# Altium PCB PCB_assembly_drawing_try2.PcbDoc (part 3 of 5)
Units mm, origin at the board's own origin, x right, y up, seen from the top; angles counter-clockwise.
Board outline 187.5 x 240 mm, 2 copper layers (Top Layer, Bottom Layer), stack 2.8 mm thick; 485 components, 419 nets, 1569 pads, 683 vias.
Unrouted connection lines stored in the file: 11.
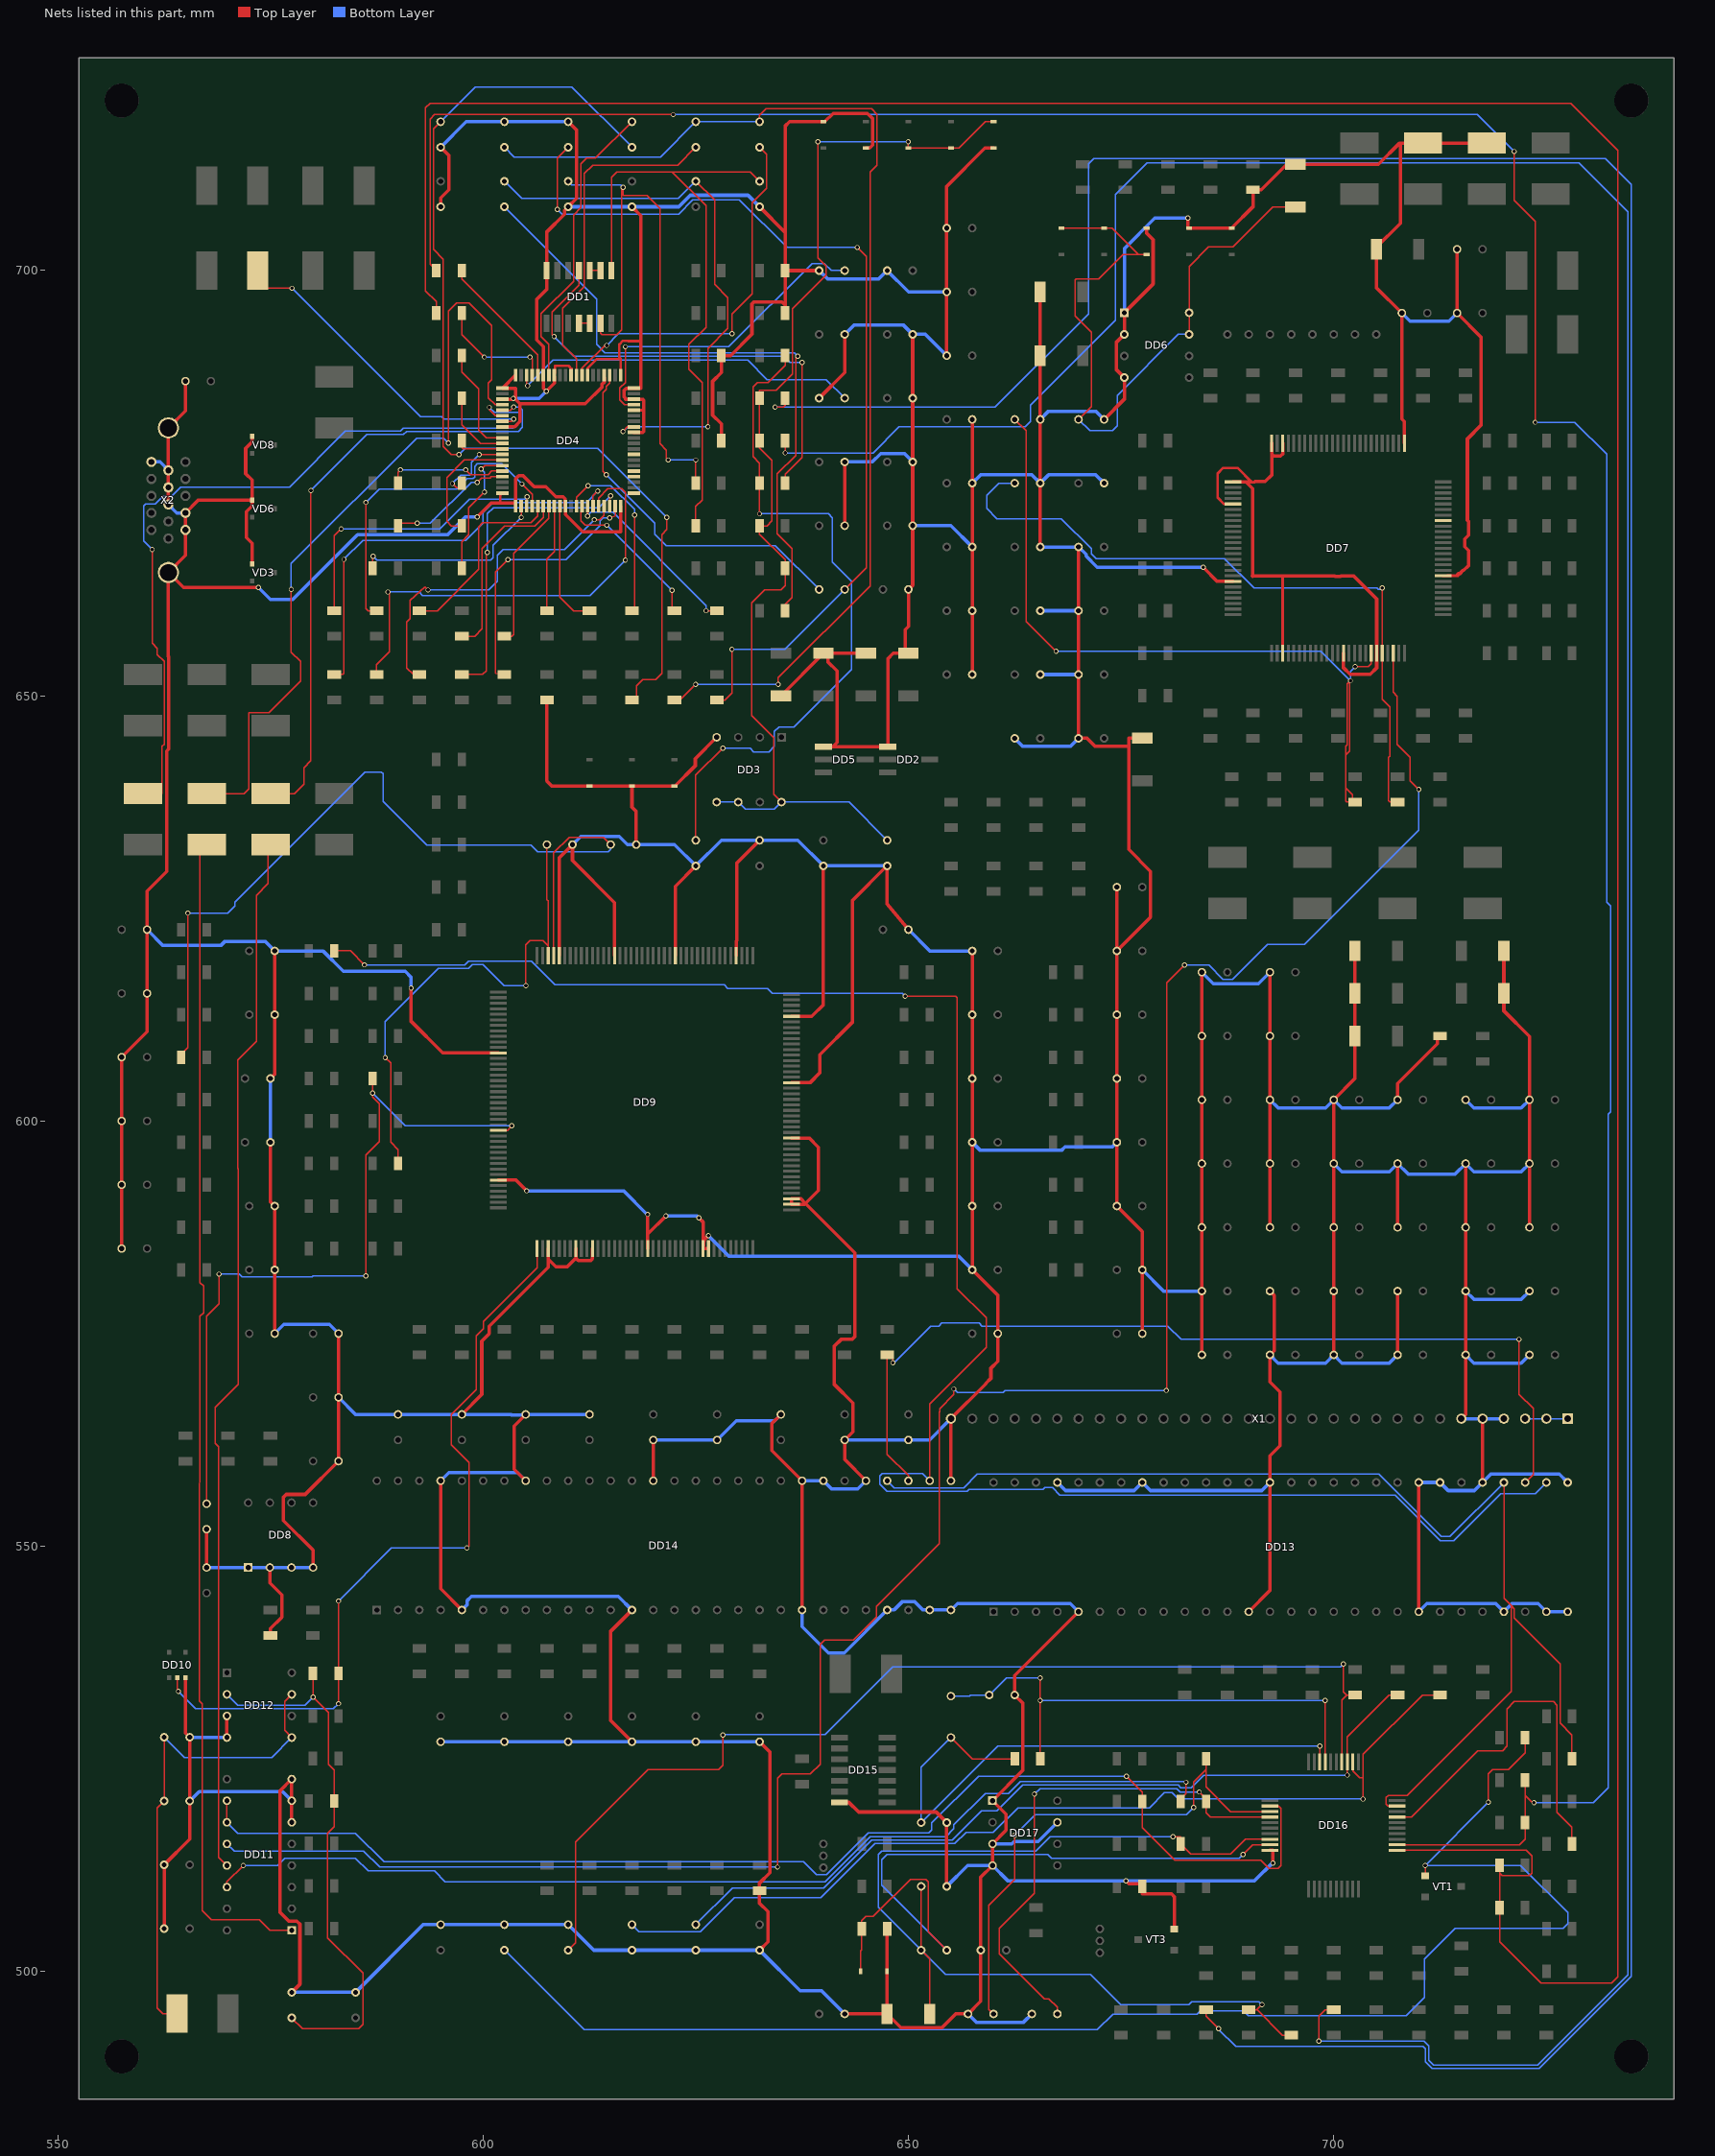
[diagram p3: the nets of this part, all layers, seen from the top]

## Via types
v1: diameter 0.6, hole 0.4, Top Layer to Bottom Layer, 677 vias
v2: diameter 0.5, hole 0.4, Top Layer to Bottom Layer, 3 vias
v3: diameter 0.4, hole 0.4, Top Layer to Bottom Layer, 2 vias
v4: diameter 0.6, hole 0.3, Top Layer to Bottom Layer, 1 vias

## Nets (pads, with @x,y where several pads share a name; then routed paths per layer and width w, separated by ;. In a path a pad name is that pad's centre, name@x,y a point inside that pad or via, vN(x,y) a via of type N, cw(c..) or ccw(c..) an arc to the next point about the centre after c; other vN are vias at no path point) (continued)
GND: C1.2 C2.2 C3.2 C4.2 C5.2 C6.2 C7.2 C8.2 C9.2 C10.2 C11.2 C12.2 C13.2 C14.2 C15.2 C17.2 C18.2 C19.2 C25.1 C26.2 C27.1 C28.2 C29.1 C30.2 C31.2 C32.2 C33.2 C34.2 C35.2 C36.2 C37.2 C38.2 C39.2 C40.2 C41.2 C42.2 C43.2 C44.1 C45.1 C46.1 C47.1 C48.1 C49.1 C50.1 C51.1 C52.2 C53.1 C54.1 C55.1 C56.1 C57.2 C58.1 C59.1 C60.1 C61.1 C62.1 C63.1 C64.2 C65.1 C66.1 C67.1 C68.1 C69.1 C70.1 C71.1 C72.1 C73.1 C74.1 C75.1 C76.1 C77.1 C78.1 C79.1 C80.1 C81.1 C82.1 C83.1 C84.1 C85.1 C86.1 C87.1 C88.1 C89.1 C90.1 C91.1 C92.1 C93.1 C94.1 C95.1 C96.1 C97.1 C98.1 C99.1 C100.1 C101.1 C102.1 C103.1 C104.1 C105.1 C106.1 C107.1 C108.1 C109.1 C110.1 C111.1 C112.1 C113.1 C114.1 C115.1 C116.1 C117.1 C118.1 C119.1 C120.1 C121.1 C122.1 C123.1 C124.1 C125.1 C126.1 C127.1 C128.2 C129.2 C130.1 C131.2 C132.2 C133.2 C134.2 C135.2 C136.2 C137.2 C138.1 C139.1 C140.1 C141.1 C142.1 C143.1 C144.1 C145.1 C146.1 C147.1 C148.1 C149.1 C150.1 C151.1 C152.1 C153.1 C154.1 C155.1 C156.1 C157.1 C158.2 C159.1 C160.2 C161.2 C162.1 C163.2 C164.2 C165.1 C166.2 C168.2 C169.2 C170.2 C171.2 C172.1 DD1.7 DD2.1 DD3.4 DD4.1 DD4.10 DD4.20 DD4.21 DD4.24 DD4.25 DD4.28 DD4.32 DD4.36 DD4.38 DD4.40 DD4.41 DD4.44 DD4.47 DD4.50 DD4.53 DD4.55 DD4.60 DD4.61 DD4.63 DD4.68 DD4.80 DD5.1 DD6.1 DD6.2 DD6.4 DD7.1 DD7.5 DD7.19 DD7.28 DD7.39 DD7.45 DD7.58 DD7.68 DD7.76 DD7.98 DD7.100 DD8.1 DD8.2 DD8.3 DD8.4 DD9.12 DD9.35 DD9.43 DD9.48 DD9.51 DD9.61 DD9.71 DD9.72 DD9.82 DD9.83 DD9.94 DD9.104 DD9.116 DD9.124 DD9.135 DD9.146 DD9.156 DD10.3 DD11.6 DD11.7 DD11.8 DD12.3 DD12.4 DD13.5 DD13.13 DD13.21 DD13.25 DD13.27 DD13.28 DD13.29 DD13.33 DD13.35 DD13.36 DD13.43 DD13.49 DD13.53 DD14.5 DD14.13 DD14.21 DD14.25 DD14.27 DD14.28 DD14.29 DD14.33 DD14.35 DD14.36 DD14.43 DD14.49 DD14.53 DD15.7 DD16.20 DD17.1 DD17.3 DD17.4 DD17.7 L16.1 L17.1 R3.1 R5.1 R15.1 R16.1 R17.1 R49.1 R178.1 R180.1 R204.1 R205.1 R218.1 VD1.1 VD2.1 VD3.1 VD4.1 VD5.1 VD6.1 VD7.1 VD8.1 VD11.1 VD12.1 VD13.1 VD14.1 VD17.1 VT3.2 X1.4 X1.5 X1.6 X1.30 X2.4 X2.5 X2.6 X2.7 X2.8 X2.11 X2.16 X2.17 | length 2764.2
  Top Layer w0.3: 602,672.6 602,672.674 602,673.547 DD4.80@602.278,673.825 ; DD4.53@608.375,687.722 608.375,687.926 608.459,688.01 608.459,688.803 610.035,688.803 610.4,688.438 DD4.50@610.4,687.7 ; DD4.47@612.275,687.722 612.275,688.513 613.362,689.6 616.175,689.6 ; DD4.41@616.175,687.722 616.175,689.6 ; DD4.36@617.722,683.575 618.775,683.575 618.8,683.6 ; 618.4,691.7 617.04,691.7 617.004,691.736 616.42,691.736 616.008,691.324 616.008,689.767 616.175,689.6 ; DD7.5@688.15,672.55 687.13,672.55 686.351,673.329 686.351,676.146 687.008,676.804 688.696,676.804 690.35,675.15 690.4,675.1 690.7,675.1 ; DD7.28@694,655 694,664.1 ; DD7.58@712.8,664.1 713.358,664.1 713.387,664.129 714.617,664.129 714.523,664.223
  Top Layer w0.4: C93.1@557.5,585 C97.1@557.5,592.5 C101.1@557.5,600 C104.1@557.5,607.5 560.5,610.5 C107.1@560.5,615 C110.1@560.5,622.5 560.5,627.048 562.797,629.345 562.797,643.515 563.054,643.772 563.054,654.554 563,654.608 X2.16@563,664.5 ; C130.1@562.5,505.04 C131.2@562.5,512.54 565.5,515.54 C132.2@565.5,520.04 C133.2@565.5,527.54 565,528.04 DD10.3@565,534.54 ; X2.8@563,672.5 X2.7@563,674.5 X2.6@563,676.5 X2.17@563,681.5 565,683.5 C172.1@565,687 ; C62.1@567.5,547.5 C90.1@567.5,552 ; DD12.4@569.88,527.5 DD12.3@569.88,530.04 ; VD3.1@572.85,665.5 572.85,667.94 572.186,668.604 572.186,671.648 572.85,672.313 VD6.1@572.85,673 ; VD8.1@572.85,680.5 572.85,679.86 572.084,679.094 572.084,676.126 572.85,675.361 VD6.1@572.85,673 ; v1(573.583,662.737) 564.763,662.737 X2.16@563,664.5 ; DD8.2@574.92,547.5 574.92,545.694 576.326,544.288 576.326,541.655 575,540.329 R178.1@575,539.5 ; C121.1@575,597.5 575,590.5 C119.1@575.5,590 C116.1@575.5,582.5 C113.1@575.5,575 ; C123.1@575,605 575.5,605.5 C125.1@575.5,612.5 C127.1@575.5,620 ; C129.2@577.5,497.54 578.46,498.5 578.46,505.562 578.104,505.917 577.164,505.917 576.142,506.939 576.142,521.262 DD11.8@577.475,522.595 ; DD11.6@577.5,517.54 577.475,517.565 577.475,520.055 DD11.7@577.5,520.08 577.475,520.105 DD11.8@577.475,522.595 ; DD11.8@577.5,522.62 DD11.8@577.475,522.595 ; DD8.4@580,547.5 580,549.538 576.504,553.034 576.504,555.759 576.834,556.089 579.089,556.089 C80.1@583,560 C84.1@583,567.5 C88.1@583,575 ; v1(591.541,615.645) 591.541,611.708 595.249,608 DD9.12@601.8,608 ; DD14.53@595,557.7 595,545 DD14.5@597.5,542.5 ; C10.2@595,707.5 595,708.538 595.96,709.498 595.96,713.54 C17.2@595,714.5 ; C106.1@597.5,565.5 599.842,567.842 599.842,574.131 600.705,574.995 600.705,575.858 607.65,582.803 607.65,583.762 ; v1(599.288,671.017) 600.939,672.668 602,672.674 ; DD9.35@601.8,593.05 603.849,593.05 v1(605.104,591.795) ; 602,672.674 DD4.1@603.809,672.684 ; DD4.68@602.278,681.629 603.727,681.629 604.342,682.244 604.342,684.327 ; DD4.63@602.278,684.875 v1@603.468,684.875 ; v1(603.555,684.962) v1@603.468,684.875 ; DD4.60@603.821,687.722 603.821,687.718 DD4.61@602.278,686.175 603.809,686.175 v1@603.809,684.875 ; DD4.1@603.825,672.278 603.825,672.668 DD4.1@603.809,672.684 ; DD14.49@605,557.7 603.642,559.058 603.642,564.142 C103.1@605,565.5 ; R17.1@607.5,649.5 607.492,649.5 607.492,639.984 608.076,639.4 VD2.1@612.5,639.4 VD1.1@617.5,639.4 ; DD9.43@607.65,585 607.65,583.762 ; 608.409,686.825 608.409,687.412 608.4,687.422 608.4,686.784 v1(607.416,685.8) 607.075,686.141 DD4.55@607.075,687.722 607.075,691.068 606.306,691.837 606.306,696.614 607.46,697.768 DD1.7@607.46,700 607.46,704.51 609.578,706.628 609.578,707.078 C7.2@610,707.5 610.972,708.472 610.972,716.528 C19.2@610,717.5 ; DD9.156@608.95,619.45 608.95,630.95 C63.1@610.5,632.5 610.5,630.622 615.45,625.672 DD9.146@615.45,619.45 ; DD9.48@610.9,585 610.9,583.874 ; DD9.51@612.85,585 612.85,583.792 612.648,583.59 611.184,583.59 610.9,583.874 ; DD4.44@614.229,687.4 614.229,686.863 613.948,686.582 613.948,686.264 612.011,684.327 604.342,684.327 ; DD4.20@616.175,672.278 616.175,669.301 616.172,669.298 611.699,669.298 609.675,671.322 DD4.10@609.675,672.278 609.64,672.313 609.64,673.175 609.406,673.409 608.544,673.409 607.355,674.599 605.993,674.599 604.698,675.894 604.19,675.894 603.809,675.513 DD4.1@603.809,672.684 ; C118.1@617.5,527 615.01,529.49 615.01,540.01 DD14.13@617.5,542.5 ; C13.2@617.5,707.5 618.541,706.459 618.541,686.175 DD4.40@617.722,686.175 616.838,686.175 616.873,686.14 616.825,686.14 616.591,685.906 616.591,685.144 616.806,684.928 616.754,684.875 DD4.38@617.722,684.875 618.744,684.875 618.871,684.748 618.871,681.102 618.744,680.975 DD4.32@617.722,680.975 ; C61.1@618,632.5 618,636.406 617.5,636.906 VD1.1@617.5,639.4 ; DD9.61@619.35,585 619.35,586.693 ; v1(619.35,589.026) 619.35,586.693 ; DD14.43@620,557.7 C96.1@620,562.5 ; v1(621.495,588.838) 619.35,586.693 ; DD9.135@622.6,619.45 622.6,627.6 C11.2@625,630 ; v1(625.365,588.61) 625.85,588.125 DD9.71@625.85,585 ; v1(626.47,586.532) 625.971,586.033 DD9.71@625.85,585 ; DD9.72@626.5,585 DD9.71@625.85,585 ; DD3.4@627.46,645.12 624.942,642.602 624.942,641.777 622.564,639.4 VD4.1@622.5,639.4 VD1.1@617.5,639.4 ; R5.1@628,680 628,681.965 626.974,682.991 626.974,686.968 628,687.995 R3.1@628,689.991 ; R3.1@628,690 R3.1@628,689.991 ; DD9.124@629.75,619.45 629.75,621.159 629.832,621.24 629.832,630.332 C37.2@632.5,633 ; C169.2@632.5,502.5 633.476,503.476 633.476,507.035 632.5,508.011 R204.1@632.5,509.5 632.5,510.402 633.705,511.607 633.705,525.795 C112.1@632.5,527 ; C8.2@632.5,707.5 635.5,704.5 ; C87.1@635,565.5 633.933,564.433 633.933,561.267 DD14.36@637.5,557.7 DD14.21@637.5,542.5 ; C40.2@635,650 C35.2@640,655 C35.2@640.563,655 ; R15.1@635.5,695 635.5,695.96 ; DD9.94@636.25,598 638.329,598 639.412,596.917 639.412,591.82 637.902,590.31 ; DD9.104@636.25,604.5 638.425,604.5 639.598,605.674 639.598,607.799 643.397,611.597 643.397,625.897 C15.2@647.5,630 647.5,625.526 C70.1@650,622.5 ; DD9.116@636.25,612.3 638.624,612.3 640,613.676 C39.2@640,630 ; C27.1@639.5,685 642.5,688 C28.2@642.5,692.5 ; C29.1@639.5,700 R16.1@635.5,700 ; DD5.1@640,644 641.096,644 ; DD15.7@641.9,519.88 643.001,519.88 644.137,518.744 653.256,518.744 C161.2@654.5,517.5 C165.1@654.5,510 ; C158.2@642.5,495 C163.2@647.5,495 ; C25.1@642.5,670 C26.2@642.5,677.5 ; DD14.33@645,557.7 642.5,560.2 C83.1@642.5,562.5 643.458,563.458 643.458,566.852 641.299,569.011 641.299,573.532 642.087,574.319 643.382,574.319 643.712,574.65 643.712,584.5 637.902,590.31 ; C14.2@645,655 C35.2@640.563,655 ; VD7.1@645,714.4 645.414,714.4 645.77,714.756 645.77,717.88 645.16,718.49 641.146,718.49 640.156,717.5 VD5.1@640,717.5 636.016,717.5 635.5,716.984 635.5,704.5 ; R205.1@647.5,505 VD17.1@647.5,500 C163.2@647.5,495 ; C6.2@650,655 C6.2@649.621,655 ; C30.2@650.5,692.5 C31.2@650.5,685 C32.2@650.5,677.5 C33.2@650.5,670 650.5,663 C34.2@650,662.5 650,658.169 649.621,657.79 C6.2@649.621,655 ; C9.2@654.5,690 C12.2@654.5,697.5 C36.2@654.5,705 654.5,709.905 658.995,714.4 VD11.1@660,714.4 ; DD14.29@655,557.7 655,561.34 X1.30@655,565 659.113,569.113 659.113,569.154 659.697,569.738 659.697,570.933 660.5,571.736 C91.1@660.5,575 660.5,579.5 C86.1@657.5,582.5 C82.1@657.5,590 C78.1@657.5,597.5 C76.1@657.5,605 C74.1@657.5,612.5 C72.1@657.5,620 ; C1.2@657.5,652.5 C2.2@657.5,660 C3.2@657.5,667.5 657.5,671.246 ; 657.5,671.246 C4.2@657.5,675 C5.2@657.5,682.5 ; C54.1@665.5,667.5 C55.1@665.5,675 C56.1@665.5,682.5 665.5,686.232 C41.2@665.5,690 665.5,693.725 C57.2@665.5,697.5 ; DD13.5@670,542.3 662.5,534.8 C160.2@662.5,532.5 663.423,531.577 663.423,523.623 DD17.1@659.88,520.08 661.488,518.472 661.488,516.608 DD17.3@659.88,515 DD17.4@659.88,512.46 658.5,511.08 C171.2@658.5,502.5 658.5,496.5 C159.1@657,495 655.553,495 653.948,493.395 649.105,493.395 C163.2@647.5,495 ; C58.1@670,667.5 C59.1@670,660 C60.1@670,652.5 C46.1@670,645 671.017,645 671.975,644.042 675.894,644.042 ; C49.1@673,682.5 675.38,684.88 DD6.4@675.38,687.42 674.421,688.379 674.421,691.541 DD6.2@675.38,692.5 DD6.1@675.38,695.04 678.764,698.424 678.764,703.656 677.977,704.444 677.977,705 VD14.1@678,705 ; C95.1@674.5,627.5 C99.1@674.5,620 ; v1(675.564,510.667) 675.919,510.311 677.5,510.311 R218.1@677.5,510 677.5,509.118 680.92,509.118 681.25,508.787 VT3.2@681.25,505 ; C117.1@677.5,575 C114.1@677.5,582.5 677.5,587 C111.1@674.5,590 C108.1@674.5,597.5 C105.1@674.5,605 C102.1@674.5,612.5 C99.1@674.5,620 ; C43.2@677.5,645 675.894,645 675.894,644.042 ; v1(682.854,706.171) 682.854,705 VD13.1@683,705 VD12.1@688,705 690.5,707.5 R49.1@690.5,709.5 691.49,709.5 694.49,712.5 C52.2@695.5,712.5 705.261,712.5 707.761,715 707.847,715 ; C73.1@684.5,572.5 C71.1@684.5,580 C68.1@684.5,587.5 C69.1@684.5,595 C65.1@684.5,602.5 C67.1@684.5,610 C66.1@684.5,617.5 ; v1(684.649,665.11) 686.309,663.45 DD7.19@688.15,663.45 ; DD7.1@688.15,675.15 689.694,675.15 ; DD13.13@690,542.3 692.5,544.8 DD13.43@692.5,557.5 692.5,560.649 693.674,561.823 693.674,568.142 692.5,569.316 C152.1@692.5,572.5 693.005,573.005 693.005,579.495 C151.1@692.5,580 ; 690.35,675.15 689.694,675.15 ; 690.7,675.15 690.75,675.2 691.946,675.2 692.7,675.954 692.7,678.434 ; DD16.20@692.5,514.25 692.861,514.25 v1(692.861,512.75) ; C150.1@692.5,587.5 C147.1@692.5,595 C144.1@692.5,602.5 C141.1@692.5,610 C138.1@692.5,617.5 ; DD7.100@692.7,679.7 692.7,678.434 ; DD7.98@694,679.7 694,678.434 693.746,678.18 692.954,678.18 692.7,678.434 ; C149.1@700,572.5 C148.1@700,580 C145.1@700,587.5 C142.1@700,595 C139.1@700,602.5 702.5,605 C135.2@702.5,610 C136.2@702.5,615 C134.2@702.5,620 ; DD7.39@701.15,655 701.15,653.288 701.912,652.526 704.288,652.526 705.05,653.288 DD7.45@705.05,655 705.05,661.394 702.344,664.1 700.866,664.1 700.816,664.05 700.812,664.054 700.188,664.054 700.184,664.05 700.134,664.1 694,664.1 690.466,664.1 ; C81.1@707.5,572.5 C77.1@707.5,580 ; C75.1@707.5,587.5 C89.1@707.5,595 ; C85.1@707.5,602.5 707.5,604.401 712.191,609.092 712.191,610 R180.1@712.5,610 ; DD7.76@708.3,679.7 708.3,682.256 708,682.556 C45.1@708,695 705,698 C42.2@705,702.5 705,702.716 707.847,705.564 707.847,715 ; DD13.21@710,542.3 DD13.36@710,557.5 ; C50.1@714.5,702.5 C47.1@714.5,695 717.296,692.204 717.296,681.787 715.713,680.204 715.713,670.653 715.854,670.512 715.854,668.87 715.408,668.425 715.408,667.533 715.846,667.096 715.846,665.3 715.297,664.752 715.211,664.752 714.804,664.345 714.645,664.345 714.523,664.223 ; X1.6@715,565 715.5,565.5 C155.1@715.5,572.5 C154.1@715.5,580 C153.1@715.5,587.5 C157.1@715.5,595 ; DD13.33@717.5,557.5 X1.5@717.5,565 ; L16.1@718,715 L17.1@710.5,715 707.847,715 ; C137.2@720,620 C64.2@720,615 720,612.947 723,609.947 C94.1@723,602.5 C98.1@723,595 C146.1@723,587.5 ; X2.16@563,664.5 565,666.5 X2.5@565,669.5 X2.4@565,671.5 566.5,673 VD6.1@572.85,673 ; v1@603.468,684.875 v1@603.809,684.875 ; v1@603.809,684.875 603.809,684.86 604.342,684.327 ; 607.65,583.762 608.551,582.862 609.887,582.862 610.9,583.874 ; R3.1@628,689.991 629.082,689.991 631.6,692.509 631.6,696.091 631.825,696.316 635.144,696.316 635.5,695.96 ; 635.5,695.96 R16.1@635.5,700 ; R16.1@635.5,700 635.5,704.5 ; 637.902,590.31 637.362,590.85 DD9.83@636.25,590.85 DD9.82@636.25,590.2 637.792,590.2 637.902,590.31 ; C35.2@640.563,655 640.563,653.948 641.604,652.907 641.604,644.508 641.096,644 ; 641.096,644 643.763,644 DD2.1@647.575,644 647.575,654.367 648.208,655 C6.2@649.621,655 ; C99.1@674.5,620 678.459,623.959 678.459,629.361 675.894,631.927 675.894,644.042 ; 689.694,675.15 690.466,674.378 690.466,664.1 ; 690.466,664.1 690.417,664.1 690.466,664.052 690.466,664.1
  Bottom Layer w0.4: C110.1@560.5,622.5 562.368,620.632 569.155,620.632 569.604,621.081 574.419,621.081 C127.1@575.5,620 581.162,620 583.561,617.601 590.829,617.601 591.541,616.89 v1(591.541,615.645) ; X2.11@561,677.5 562,677.5 X2.6@563,676.5 ; X2.8@563,672.5 564,671.5 X2.4@565,671.5 ; C132.2@565.5,520.04 566.617,521.157 576.423,521.157 DD11.7@577.5,520.08 ; C133.2@565.5,527.54 567.665,527.54 567.705,527.5 DD12.4@569.88,527.5 ; C62.1@567.5,547.5 DD8.1@572.38,547.5 DD8.2@574.92,547.5 DD8.3@577.46,547.5 DD8.4@580,547.5 ; v1(573.583,662.737) 574.997,661.322 577.621,661.322 585.233,668.934 595.833,668.934 597.916,671.017 v1(599.288,671.017) ; C121.1@575,597.5 C123.1@575,605 ; C113.1@575.5,575 576.572,576.072 581.928,576.072 C88.1@583,575 ; C129.2@577.5,497.54 C128.2@585,497.54 592.96,505.5 C126.1@595,505.5 C170.2@602.5,505.5 C164.2@610,505.5 613,502.5 C168.2@617.5,502.5 C166.2@625,502.5 C169.2@632.5,502.5 637.287,497.713 639.787,497.713 C158.2@642.5,495 ; C84.1@583,567.5 585,565.5 C109.1@590,565.5 C106.1@597.5,565.5 603.297,565.5 603.391,565.406 604.906,565.406 C103.1@605,565.5 608.736,565.5 C100.1@612.5,565.5 ; C124.1@595,527 C122.1@602.5,527 C120.1@610,527 C118.1@617.5,527 C115.1@625,527 C112.1@632.5,527 ; DD14.53@595,557.7 595.973,558.673 604.027,558.673 DD14.49@605,557.7 ; C17.2@595,714.5 598,717.5 C18.2@602.5,717.5 C19.2@610,717.5 ; DD14.5@597.5,542.5 598.096,543.096 598.096,543.56 598.644,544.108 615.892,544.108 DD14.13@617.5,542.5 ; v1(603.555,684.962) 606.577,684.962 v1(607.416,685.8) ; v1(605.104,591.795) 616.504,591.795 619.273,589.026 v1(619.35,589.026) ; C7.2@610,707.5 C13.2@617.5,707.5 622.99,707.5 624.348,708.858 631.142,708.858 C8.2@632.5,707.5 ; C63.1@610.5,632.5 611.476,633.476 615.99,633.476 616.966,632.5 C61.1@618,632.5 622.5,632.5 C11.2@625,630 628,633 C37.2@632.5,633 637,633 C39.2@640,630 C15.2@647.5,630 ; C96.1@620,562.5 C92.1@627.5,562.5 629.761,564.761 634.261,564.761 C87.1@635,565.5 ; v1(621.495,588.838) 625.138,588.838 v1(625.365,588.61) ; v1(626.47,586.532) 628.879,584.124 655.876,584.124 C86.1@657.5,582.5 ; DD14.21@637.5,542.5 637.5,540.548 640.584,537.464 642.464,537.464 DD14.25@647.5,542.5 648.291,542.5 649.249,543.458 650.755,543.458 651.713,542.5 DD14.27@652.5,542.5 DD14.28@655,542.5 655.755,543.255 669.045,543.255 DD13.5@670,542.3 ; DD14.36@637.5,557.7 DD14.35@640,557.7 640.957,556.743 644.043,556.743 DD14.33@645,557.7 ; C29.1@639.5,700 640.467,699.033 646.533,699.033 C38.2@647.5,700 650,697.5 C12.2@654.5,697.5 ; C83.1@642.5,562.5 C79.1@650,562.5 652.5,562.5 X1.30@655,565 ; C26.2@642.5,677.5 645.769,677.5 646.728,678.459 649.541,678.459 C32.2@650.5,677.5 ; C28.2@642.5,692.5 643.572,693.572 649.428,693.572 C30.2@650.5,692.5 652,692.5 C9.2@654.5,690 ; C70.1@650,622.5 652.5,620 C72.1@657.5,620 ; C33.2@650.5,670 655,670 C3.2@657.5,667.5 ; C165.1@654.5,510 656.96,512.46 DD17.4@659.88,512.46 661.665,510.675 ; C159.1@657,495 657.97,494.03 663.53,494.03 C162.1@664.5,495 ; C78.1@657.5,597.5 658.456,596.544 667.989,596.544 668.415,596.971 673.971,596.971 C108.1@674.5,597.5 ; C4.2@657.5,675 658.47,675.97 664.53,675.97 C55.1@665.5,675 666.47,675.97 672.03,675.97 C44.1@673,675 ; DD17.3@659.88,515 662.168,515 662.44,515.272 665.232,515.272 DD17.7@667.5,517.54 ; C48.1@662.5,645 663.458,644.042 669.042,644.042 C46.1@670,645 ; C51.1@665.5,652.5 C60.1@670,652.5 ; C53.1@665.5,660 C59.1@670,660 ; C54.1@665.5,667.5 C58.1@670,667.5 670.877,666.623 670.877,666.437 672.204,665.11 v1(684.649,665.11) ; C56.1@665.5,682.5 666.463,683.463 672.037,683.463 C49.1@673,682.5 ; DD13.53@667.5,557.5 668.461,556.539 676.539,556.539 DD13.49@677.5,557.5 678.461,556.539 691.539,556.539 DD13.43@692.5,557.5 ; DD6.1@675.38,695.04 675.38,702.58 678.97,706.171 v1(682.854,706.171) ; v1(675.564,510.667) 661.673,510.667 661.665,510.675 ; C114.1@677.5,582.5 680,580 C71.1@684.5,580 ; C66.1@684.5,617.5 685.858,616.142 691.142,616.142 C138.1@692.5,617.5 ; C152.1@692.5,572.5 693.475,571.525 699.025,571.525 C149.1@700,572.5 700.975,571.525 706.525,571.525 C81.1@707.5,572.5 ; C144.1@692.5,602.5 693.477,601.523 699.023,601.523 C139.1@700,602.5 700.977,601.523 706.523,601.523 C85.1@707.5,602.5 ; v1(692.861,512.75) 692.861,512.826 690.71,510.675 661.665,510.675 ; C142.1@700,595 700.97,594.03 706.53,594.03 C89.1@707.5,595 708.733,593.767 714.267,593.767 C157.1@715.5,595 716.47,594.03 722.03,594.03 C98.1@723,595 ; C45.1@708,695 708.97,694.03 713.53,694.03 C47.1@714.5,695 ; DD13.21@710,542.3 710.955,543.255 719.045,543.255 DD13.25@720,542.3 720.955,543.255 724.045,543.255 DD13.27@725,542.3 DD13.28@727.5,542.3 ; DD13.36@710,557.5 DD13.35@712.5,557.5 713.461,556.539 716.539,556.539 DD13.33@717.5,557.5 718.47,558.47 726.53,558.47 DD13.29@727.5,557.5 ; X1.6@715,565 X1.5@717.5,565 X1.4@720,565 ; C155.1@715.5,572.5 716.475,571.525 722.025,571.525 C140.1@723,572.5 ; C154.1@715.5,580 716.456,579.044 722.044,579.044 C143.1@723,580 ; C156.1@715.5,602.5 716.477,601.523 722.023,601.523 C94.1@723,602.5
HP_SENSE: DD16.37 R217.2 | length 44.2
  Top Layer w0.15: DD16.37@707.45,518.15 708.321,518.15 708.321,518.154 709.137,518.154 716.94,525.958 719.836,525.958 720.369,526.491 720.369,530.86 721.233,531.724 725.826,531.724 726.234,531.315 726.234,518.706 728,516.941 R217.2@728,515
HSYNC_D: DD7.48 DD11.12 | length 268.3
  Top Layer w0.15: v1(634.594,512.267) 634.594,522.732 635.102,523.24 638.48,523.24 639.623,524.383 639.623,538.48 640.131,538.988 643.56,538.988 646.227,541.655 646.227,542.9 653.618,550.291 653.618,565.76 653.669,565.81 653.669,566.166 655.345,567.842 v1(655.345,568.503) ; v1(680.314,568.325) 680.364,568.376 680.364,616.229 v1(682.473,618.338) ; DD7.48@707,655 707,650.427 707.466,649.961 707.466,644.269 708.988,642.747 708.988,640.006 v1(710.006,638.988)
  Bottom Layer w0.15: DD11.12@569.88,515 570.733,514.147 585.953,514.147 587.832,512.267 v1(634.594,512.267) ; v1(655.345,568.503) 655.757,568.091 661.137,568.091 661.37,568.325 v1(680.314,568.325) ; v1(682.473,618.338) 685.317,618.338 686.984,616.671 688.086,616.671 692.191,620.776 696.57,620.776 710.006,634.213 v1(710.006,638.988)
HSYNC_IN: DD11.14 R184.1 | length 123.4
  Top Layer w0.15: DD11.14@569.88,509.92 569.88,510.546 v1(571.805,512.47) ; R184.1@682,520 682,520.294 682.65,520.944 v1(682.65,522.249)
  Bottom Layer w0.15: v1(571.805,512.47) 575.818,512.47 576.656,513.309 584.986,513.309 586.485,511.81 594.278,511.81 595.548,510.54 640.207,510.54 645.509,515.842 654.399,515.842 655.345,516.788 655.345,517.226 659.028,520.909 661.757,520.909 663.175,522.328 682.572,522.328 v1(682.65,522.249)
HSYNC_X: DD9.41 DD10.2 R170.1 | length 91.7
  Top Layer w0.15: DD10.2@564.05,534.54 564.05,533.052 v1(564.185,532.917) ; v1(583,531.489) R170.1@583,535.04 v1(583,543.56) ; v1(598.094,549.783) 598.329,550.018 598.329,559.848 596.267,561.91 596.267,565.508 599.186,568.427 599.186,574.717 600.059,575.59 600.059,576.436 606.35,582.727 DD9.41@606.35,585
  Bottom Layer w0.15: v1(564.185,532.917) 566.217,530.885 582.397,530.885 v1(583,531.489) ; v1(583,543.56) 589.223,549.783 v1(598.094,549.783)
INPUT_SELECT: DD11.10 DD11.11 DD16.12 R181.1 | length 149.5
  Top Layer w0.15: DD11.11@569.88,517.54 DD11.10@569.88,520.08 ; v1(675.646,522.961) 677.5,521.106 R181.1@677.5,520 677.5,516.925 681.345,513.08 691.419,513.08 692.379,512.121 693.451,512.121 693.776,512.445 693.776,519.176 693.502,519.45 DD16.12@692.5,519.45
  Bottom Layer w0.15: DD11.11@569.88,517.54 571.165,516.255 584.987,516.255 588.34,512.902 637.64,512.902 639.171,511.371 640.39,511.371 645.286,516.267 652.364,516.267 652.733,516.636 652.733,517.453 658.241,522.961 v1(675.646,522.961)
LCD_CLK: DD13.31 DD14.31 R130.1 | length 111.7
  Top Layer w0.15: v1(648.183,571.576) 648.183,572.5 R130.1@647.5,572.5 647.497,572.5 647.497,560.807 650,558.303 DD14.31@650,557.7 ; v1(721.792,574.319) 721.792,567.842 723.443,566.191 723.443,558.443 DD13.31@722.5,557.5
  Bottom Layer w0.15: v1(648.183,571.576) 648.259,571.5 652.637,575.879 653.581,575.879 653.936,576.233 658.291,576.233 658.645,575.879 680.482,575.879 682.041,574.319 v1(721.792,574.319)
LCD_DE: DD13.30 DD14.30 R129.1 | length 228.4
  Top Layer w0.15: R129.1@582.5,620 582.5,620.014 584.403,620.014 v1(586.054,618.363) ; v1(649.605,614.68) 655.549,614.68 655.745,614.483 655.745,580.27 659.155,576.859 659.155,573.387 652.5,566.731 DD14.30@652.5,557.7
  Bottom Layer w0.15: v1(586.054,618.363) 597.865,618.363 598.314,618.812 605.654,618.812 608.465,616.001 628.333,616.001 628.748,615.586 633.44,615.586 634.002,615.024 649.261,615.024 v1(649.605,614.68) ; DD14.30@652.5,557.7 651.671,558.529 646.938,558.529 646.659,558.25 646.659,557.276 647.469,556.466 656.92,556.466 657.121,556.666 665.836,556.666 666.05,556.881 666.947,556.881 667.817,556.01 707.208,556.01 712.546,550.672 714.121,550.672 719.633,556.184 723.684,556.184 DD13.30@725,557.5
LCD_VCC: X1.1 X1.2 X1.3 | length 5
  Bottom Layer w0.15: X1.3@722.5,565 X1.2@725,565 X1.1@727.5,565
LVDS_PD: DD13.32 DD14.32 DD16.39 R213.2 | length 147.1
  Top Layer w0.15: DD16.39@707.45,519.45 706.374,519.45 706.171,519.653 706.171,520.446 706.425,520.7 708.635,520.7 720.852,532.917 720.852,543.013 ; DD13.32@720,557.5 720,543.865 720.852,543.013 ; R213.2@728,525 728,527.827 726.638,529.188 726.638,536.148 721.233,541.553 721.233,542.632 720.852,543.013
  Bottom Layer w0.15: DD14.32@647.5,557.7 648.33,556.87 656.514,556.87 658.114,558.47 705.323,558.47 712.613,551.18 713.68,551.18 DD13.32@720,557.5
MCU_H_IN: DD11.13 L11.2 | length 123.5
  Top Layer w0.15: DD11.13@569.88,512.46 568.909,513.431 568.909,561.714 568.521,562.102 568.521,566.337 571.21,569.025 571.21,594.363 571.17,594.403 571.17,607.162 573.354,609.346 573.354,626.542 574.726,627.913 574.726,632.5 L11.2@575,632.5
MCU_ISP_SCL: R12.1 R185.1 | length 382.1
  Top Layer w0.15: v1(635.5,678.561) R12.1@635.5,680 ; v1(698.246,491.795) 698.246,494.738 699.008,495.5 R185.1@700,495.5
  Bottom Layer w0.15: v1(635.5,678.561) 645.818,678.561 648.917,681.66 663.753,681.66 664.337,682.244 664.337,684.174 674.345,694.182 674.345,708.965 678.065,712.685 728.815,712.685 734.593,706.907 734.593,499.593 724.001,489.001 711.708,489.001 711.175,489.534 711.175,491.235 710.615,491.795 v1(698.246,491.795)
MCU_ISP_SDA: R13.1 R186.1 | length 396
  Top Layer w0.15: v1(634.314,683.946) 635.297,683.946 635.5,684.149 R13.1@635.5,685 ; R186.1@685,495.5 685,494.728 v1(686.46,493.268)
  Bottom Layer w0.15: v1(634.314,683.946) 660.197,683.946 671.17,694.919 671.17,712.546 671.813,713.189 731.918,713.189 735,710.108 735,499.428 724.168,488.597 711.541,488.597 710.771,489.367 710.771,490.929 710.5,491.2 ; v1(686.46,493.268) 686.46,493.166 688.467,491.16 710.54,491.16
MCU_SCL1: DD16.32 R24.1 R230.2 R234.1 | length 380.7
  Top Layer w0.15: R24.1@594.5,700 594.5,700.039 593.75,700.788 593.75,717.804 594.284,718.337 v1(622.351,718.337) ; DD16.32@707.45,514.9 721.834,514.9 722.5,515.566 R234.1@722.5,517.5 722.5,520.7 ; v1(721.208,713.994) 721.208,708.254 723.671,705.79 v1(723.671,682.168) ; R230.2@722.5,522.5 722.5,520.7 ; v1(723.544,519.836) 723.364,519.836 722.5,520.7
  Bottom Layer w0.15: v1(622.351,718.337) 716.864,718.337 v1(721.208,713.994) ; v1(723.544,519.836) 730.504,519.836 732.257,521.589 732.257,600.786 732.561,601.091 732.561,625.272 732.079,625.754 732.079,678.434 728.345,682.168 v1(723.671,682.168)
MCU_SDA1: DD16.31 R23.1 R229.2 R235.1 | length 429.4
  Top Layer w0.15: R23.1@594.5,695 594.5,696.341 593.222,697.619 593.222,719.13 593.75,719.658 727.842,719.658 733.374,714.126 733.374,499.364 732.663,498.653 724.351,498.653 719.5,503.504 R229.2@719.5,507.5 719.5,511.556 ; DD16.31@707.45,514.25 722.628,514.25 723.29,513.588 723.29,511.556 722.986,511.251 719.805,511.251 719.5,511.556 ; R235.1@719.5,512.5 719.5,511.556
MCU_V_IN: DD11.1 L10.2 | length 138.1
  Top Layer w0.15: L10.2@567.5,632.5 566.725,632.5 566.725,580.981 567.126,580.579 567.126,577.465 566.725,577.064 566.725,557.505 566.649,557.428 566.649,531.828 566.983,531.493 566.983,507.158 568.046,506.095 573.684,506.095 574.939,504.84 DD11.1@577.5,504.84
NetC7_1: C7.1 DD1.13 R6.2 | length 69.4
  Top Layer w0.15: DD1.13@613.81,693.8 613.81,692.658 613.988,692.48 615.696,692.48 616.267,693.051 616.267,709.612 v1(616.458,709.803) 616.458,708.818 619.283,708.818 620.8,707.302 620.8,679.638 621.546,678.891 621.546,677.943 v1(621.767,677.723) ; R6.2@625,675 v1(625,677.723)
  Bottom Layer w0.15: C7.1@610,710.5 610.418,710.082 616.179,710.082 v1(616.458,709.803) ; v1(621.767,677.723) v1(625,677.723)
NetC8_1: C8.1 DD1.1 R7.2 | length 74.2
  Top Layer w0.15: DD1.1@615.08,700 615.08,710.99 615.696,711.606 622.224,711.606 ; R7.2@625,670 625,672.244 625.78,673.024 625.78,686.816 624.205,688.391 624.205,691.337 626.186,693.318 626.186,707.644 622.224,711.606 ; C8.1@632.5,710.5 631.394,711.606 622.224,711.606
NetC11_1: C11.1 R11.2 R14.1 | length 81.3
  Top Layer w0.15: C11.1@625,633 625,640.672 v1(628.173,643.845) ; v1(632.5,671.398) R11.2@632.5,675 632.5,677.342 631.723,678.118 631.723,686.308 632.231,686.816 633.468,686.816 635.5,688.848 R14.1@635.5,690
  Bottom Layer w0.15: v1(628.173,643.845) 631.387,643.845 631.826,643.406 633.602,643.406 634.251,644.055 634.251,645.795 634.797,646.341 636.562,646.341 643.331,653.11 643.331,663.473 641.071,665.734 641.071,670.916 640.588,671.398 v1(632.5,671.398)
NetC15_1: C15.1 DD3.5 DD3.6 DD3.8 R9.2 R10.2 R12.2 R13.2 VD9.2 VD10.2 VD11.2 | length 134.9
  Top Layer w0.15: R10.2@632.5,670 R10.2@632.5,669.976 ; DD3.8@635.08,637.5 634.162,638.418 634.162,645.109 631.596,647.675 631.596,660.959 633.07,662.432 634.992,662.432 635.5,662.94 R9.2@635.5,665 635.5,665.988 632.5,668.988 R10.2@632.5,669.976 ; v1(639.369,715.162) 639.369,701.492 640.329,700.532 640.329,699.486 636.346,695.503 636.346,687.832 634.441,685.927 632.5,685.927 R13.2@632.5,685 R12.2@632.5,680 632.5,679.156 633.959,677.697 633.959,670.56 633.374,669.976 R10.2@632.5,669.976 ; v1(649.986,715.162) 649.986,714.4 VD9.2@650,714.4 VD10.2@655,714.4 655.93,714.4 659.03,717.5 VD11.2@660,717.5
  Bottom Layer w0.15: DD3.5@627.46,637.5 DD3.6@630,637.5 630.849,636.651 634.231,636.651 DD3.8@635.08,637.5 643,637.5 C15.1@647.5,633 ; v1(639.369,715.162) v1(649.986,715.162)
NetC16_1: C16.1 C20.1 DD4.33 | length 67.3
  Top Layer w0.15: v1(616.433,681.076) 616.982,681.625 DD4.33@617.722,681.625 ; C16.1@625,710.5 627.202,708.298 627.202,698.398 628.777,696.824 628.777,693.22 626.415,690.858 v1(626.415,681.634)
  Bottom Layer w0.15: C20.1@602.5,710.5 604.537,708.463 622.963,708.463 C16.1@625,710.5 ; v1(616.433,681.076) 616.991,681.634 v1(626.415,681.634)
NetC17_1: C17.1 C21.2 R19.2 | length 120.9
  Top Layer w0.15: C17.1@595,717.5 594.157,716.657 594.157,702.483 595.3,701.34 595.3,679.313 596.265,678.348 v1(597.145,678.348) ; R19.2@617.5,649.5 618.007,649.5 618.007,651.154 618.769,651.916 620.268,651.916 621.005,652.653 621.005,668.96 621.589,669.544 v1(621.589,670.992)
  Bottom Layer w0.15: C17.1@595,717.5 599.089,721.589 610.411,721.589 C21.2@617.5,714.5 ; v1(597.145,678.348) 597.891,679.094 613.486,679.094 v1(621.589,670.992)
NetC18_1: C18.1 C22.2 C23.2 R20.2 | length 132.1
  Top Layer w0.15: R20.2@622.5,649.5 623.138,649.5 624.992,651.354 v1(624.992,651.358) ; C23.2@632.5,717.5 632.5,718.25 633.273,719.023 645.668,719.023 646.303,718.388 646.303,712.368 645.507,711.573 645.507,662.932 634.695,652.12 v1(634.695,651.358)
  Bottom Layer w0.15: C18.1@602.5,714.5 603.641,713.359 620.859,713.359 C22.2@625,717.5 C23.2@632.5,717.5 ; v1(624.992,651.358) v1(634.695,651.358)
NetC19_1: C19.1 C24.2 R21.2 | length 111.4
  Top Layer w0.15: v1(608.736,707.187) 608.736,713.236 C19.1@610,714.5 ; R21.2@627.5,649.5 628.396,649.5 629.234,650.338 v1(629.234,655.472) ; C24.2@642.5,662.5 645.033,665.033 645.033,701.65 v1(643.966,702.716)
  Bottom Layer w0.15: v1(608.736,707.187) 609.27,706.653 622.981,706.653 624.657,708.329 630.123,708.329 635.736,702.716 v1(643.966,702.716) ; v1(629.234,655.472) 635.472,655.472 C24.2@642.5,662.5
NetC20_2: C20.2 R22.2 | length 76.9
  Top Layer w0.15: R22.2@635.5,660 635.5,660.756 636.295,661.551 636.295,667.309 634.568,669.036 634.568,676.097 636.75,678.279 636.75,689.709 v1(636.981,689.94)
  Bottom Layer w0.15: C20.2@602.5,707.5 613.334,696.666 613.334,691.312 614.299,690.347 636.575,690.347 v1(636.981,689.94)
NetC21_1: C21.1 DD4.54 | length 35.2
  Top Layer w0.15: DD4.54@607.725,687.722 607.725,691.358 606.835,692.248 606.835,694.944 610.641,698.75 610.641,706.526 611.505,707.39 611.505,712.572 612.14,713.207 613.207,713.207 C21.1@617.5,717.5
NetC22_1: C22.1 DD4.49 | length 39.8
  Top Layer w0.15: DD4.49@610.975,687.722 610.975,689.632 609.371,691.236 609.371,695.554 611.911,698.094 611.911,711.403 612.897,712.389 622.889,712.389 C22.1@625,714.5
NetC23_1: C23.1 DD4.48 | length 44.1
  Top Layer w0.15: DD4.48@611.625,687.722 611.625,688.54 614.282,691.197 v1(614.515,691.197) ; v1(629.26,692.582) 629.26,694.896 631.647,697.284 631.647,707.974 633.349,709.676 633.349,713.651 C23.1@632.5,714.5
  Bottom Layer w0.15: v1(614.515,691.197) 615.899,692.582 v1(629.26,692.582)
NetC24_1: C24.1 DD4.43 | length 43.6
  Top Layer w0.15: v1(614.477,675.996) 614.1,676.372 614.1,685.668 614.477,686.045 614.477,686.363 614.875,686.761 DD4.43@614.875,687.722
  Bottom Layer w0.15: v1(614.477,675.996) 620.17,670.302 620.17,669.028 621.559,667.639 634.361,667.639 C24.1@639.5,662.5
NetC27_2: C27.2 DD4.58 | length 41.7
  Top Layer w0.15: DD4.58@605.125,687.722 605.125,686.567 v1(605.231,686.46)
  Bottom Layer w0.15: v1(605.231,686.46) 608.222,689.452 631.094,689.452 633.374,687.172 640.328,687.172 C27.2@642.5,685
NetC29_2: C29.2 DD4.37 | length 38.6
  Top Layer w0.15: v1(616.712,691.032) 616.712,686.831 616.062,686.18 616.062,684.777 616.613,684.225 DD4.37@617.722,684.225
  Bottom Layer w0.15: v1(616.712,691.032) 628.861,691.032 638.658,700.829 640.088,700.829 640.917,700 C29.2@642.5,700
NetC49_2: C49.2 C52.1 DD6.7 DD6.8 VD14.2 VD15.2 VD16.2 | length 81.5
  Top Layer w0.15: VD16.2@668,705 VD15.2@673,705 673.938,705 677.038,701.9 ; C49.2@670,682.5 671.5,684 671.5,692.734 669.569,694.665 669.569,698.881 669.696,699.008 672.342,699.008 675.234,701.9 677.038,701.9 ; VD14.2@678,701.9 677.038,701.9 ; DD6.7@683,692.5 DD6.8@683,695.04 683,700.501 685.292,702.793 688.154,702.793 692.861,707.5 C52.1@695.5,707.5
  Bottom Layer w0.15: C49.2@670,682.5 671.324,681.176 673.988,681.176 674.548,681.736 674.548,685.304 681.744,692.5 DD6.7@683,692.5
NetC55_2: C55.2 DD7.46 R98.1 | length 82.9
  Top Layer w0.15: v1(705.7,662.678) DD7.46@705.7,655 705.7,649.567 706.577,648.689 706.577,642.899 706.425,642.747 706.425,637.667 706.592,637.5 R98.1@707.5,637.5
  Bottom Layer w0.15: C55.2@662.5,675 660.598,675 659.187,673.589 659.187,672.053 660.426,670.814 667.969,670.814 671.5,667.283 671.5,666.699 672.058,666.14 687.146,666.14 690.616,662.671 700.761,662.671 700.767,662.678 705.074,662.678 705.252,662.5 705.522,662.5 v1(705.7,662.678)
NetC56_2: C56.2 DD7.44 R99.1 | length 96.7
  Top Layer w0.15: C56.2@662.5,682.5 663.829,681.171 663.829,658.749 v1(667.36,655.218) ; v1(701.954,651.764) v1@701.853,651.662 ; R99.1@702.5,637.5 R99.1@702.208,637.5 ; v1(702.513,653.44) 704.088,653.44 704.4,653.752 DD7.44@704.4,655 ; 701.421,639.14 702.208,638.353 R99.1@702.208,637.5 ; 701.421,639.14 701.421,637.627 701.548,637.5 R99.1@702.208,637.5 ; 701.421,639.14 701.421,643.077 ; 701.421,643.077 701.853,643.509 v1@701.853,651.662 ; 701.421,643.077 701.421,644.042 701.599,644.22 701.599,651.408 v1@701.853,651.662
  Bottom Layer w0.15: v1(667.36,655.218) 698.5,655.218 v1(701.954,651.764) 701.954,652.882 v1(702.513,653.44)
NetC61_2: C61.2 DD9.157 R108.1 | length 100.5
  Top Layer w0.15: R108.1@564.5,607.5 564.5,607.847 565.302,608.65 v1(565.302,624.459) ; DD9.157@608.3,619.45 608.3,631.541 610.108,633.349 614.151,633.349 C61.2@615,632.5
  Bottom Layer w0.15: v1(565.302,624.459) 569.976,624.459 570.789,625.272 570.789,625.721 586.105,641.037 588.035,641.037 588.23,640.842 588.23,637.565 593.375,632.42 605.627,632.42 606.4,631.647 614.695,631.647 615,631.952 C61.2@615,632.5
NetC63_2: C63.2 DD9.158 R109.1 | length 58.6
  Top Layer w0.15: v1(588.493,607.466) 589.128,606.831 589.128,597.51 590,596.637 R109.1@590,595 ; v1(605.028,615.925) 605.028,620.7 605.536,621.208 607.06,621.208 607.65,620.618 ; C63.2@607.5,632.5 607.5,626.031 607.65,625.881 607.65,620.618 ; DD9.158@607.65,619.45 607.65,620.618
  Bottom Layer w0.15: v1(588.493,607.466) 588.493,611.681 594.762,617.951 598.278,617.951 598.735,618.408 599.993,618.408 602.476,615.925 v1(605.028,615.925)
NetC90_2: C90.2 DD9.26 R169.2 | length 89
  Top Layer w0.15: C90.2@567.5,555 567.5,577.031 568.96,578.491 v1(568.96,581.99) ; v1(586.207,581.788) 586.207,595.986 587.781,597.56 587.781,602.037 587,602.818 v1(587,603.275) R169.2@587,605 ; DD9.26@601.8,598.9 602.837,598.9 v1(603.377,599.44)
  Bottom Layer w0.15: v1(568.96,581.99) 571.348,581.99 571.678,581.66 579.905,581.66 580.032,581.788 v1(586.207,581.788) ; v1(587,603.275) 590.835,599.44 v1(603.377,599.44)
NetC129_1: C129.1 DD12.2 R170.2 R173.2 | length 64.5
  Top Layer w0.15: C129.1@577.5,494.54 578.772,493.268 585.343,493.268 585.851,493.776 585.851,499.821 581.711,503.961 581.711,516.253 582.5,517.042 R173.2@582.5,520.04 582.5,523.695 581.821,524.374 581.821,530.461 v1(580,532.273) R170.2@580,535.04
  Bottom Layer w0.15: DD12.2@569.88,532.58 571.143,531.317 579.044,531.317 v1(580,532.273)
NetC132_1: C132.1 C133.1 DD12.5 DD12.7 L20.1 | length 57.5
  Top Layer w0.15: C133.1@562.5,527.54 C132.1@562.5,520.04 561.67,519.21 561.67,495.706 562.356,495.021 564,495.021 L20.1@564,495.04 ; DD12.5@577.5,527.5 576.656,528.344 576.656,531.736 DD12.7@577.5,532.58
  Bottom Layer w0.15: C133.1@562.5,527.54 564.87,525.17 575.17,525.17 DD12.5@577.5,527.5
NetC159_2: C159.2 DD16.13 R183.2 | length 61.9
  Top Layer w0.15: C159.2@660,495 659.46,495.54 659.46,507.771 662.483,510.794 v1(662.483,516.026) ; v1(683.533,519.272) 683.533,522.243 685,523.71 ; R183.2@685,525 685,523.71 ; DD16.13@692.5,518.8 687.891,518.8 685,521.691 685,523.71
  Bottom Layer w0.15: v1(662.483,516.026) 664.899,518.443 682.705,518.443 v1(683.533,519.272)
NetC160_1: C160.1 DD16.7 R199.2 ZQ1.2 | length 61.6
  Top Layer w0.15: R199.2@665.5,525 v1(665.5,531.851) v1(665.5,534.518) ; DD16.7@699,524.65 v1(699,531.851)
  Bottom Layer w0.15: ZQ1.2@655,532.38 657.174,532.38 657.294,532.5 C160.1@659.5,532.5 661.518,534.518 v1(665.5,534.518) ; v1(665.5,531.851) v1(699,531.851)
NetC161_1: C161.1 DD16.8 R199.1 ZQ1.1 | length 72.4
  Top Layer w0.15: ZQ1.1@655,527.5 657.5,525 R199.1@662.5,525 ; DD16.8@698.35,524.65 v1(698.35,526.494)
  Bottom Layer w0.15: ZQ1.1@655,527.5 651.5,524 C161.1@651.5,517.5 660.494,526.494 v1(698.35,526.494)
NetC162_2: C162.2 DD16.14 R184.2 | length 61
  Top Layer w0.15: v1(664.82,520.852) 664.82,509.194 660.671,505.045 660.671,502.09 665.963,496.799 666.509,496.799 667.5,495.808 C162.2@667.5,495 ; v1(684.187,521.106) 685,520.294 R184.2@685,520 685,518.668 685.518,518.15 DD16.14@692.5,518.15
  Bottom Layer w0.15: v1(664.82,520.852) 665.462,521.495 681.534,521.495 681.923,521.106 v1(684.187,521.106)
NetC163_1: C163.1 C165.2 C167.2 DD16.18 R198.1 R200.1 R201.1 | length 128.8
  Top Layer w0.15: C165.2@651.5,510 C167.2@651.5,502.5 652.5,501.5 C163.1@652.5,495 ; v1(681.101,515.849) 682,515.849 R201.1@682,515 683.183,513.817 687.883,513.817 689.616,515.55 DD16.18@692.5,515.55 ; v1(691.566,496.109) 690.969,495.512 ; R198.1@695,492.5 693.982,492.5 690.969,495.512 ; 690.969,495.512 R200.1@690,495.5 690.957,495.5 690.969,495.512
  Bottom Layer w0.15: v1(681.101,515.849) 666.646,515.849 664.968,514.171 646.886,514.171 646.455,513.74 646.455,507.545 C167.2@651.5,502.5 654.357,499.643 671.424,499.643 674.958,496.109 682.945,496.109 683.282,496.447 691.228,496.447 v1(691.566,496.109)
NetC164_1: C164.1 DD16.4 R195.1 | length 127.9
  Top Layer w0.15: C164.1@610,502.5 610.845,503.345 610.845,515.214 619.379,523.748 627.685,523.748 628.193,524.256 v1(628.193,527.787) ; DD16.4@700.95,524.65 700.95,531.902 701.541,532.493 ; v1(701.142,536.143) 701.142,532.892 701.541,532.493 ; 701.541,532.493 R195.1@702.5,532.5 701.548,532.5 701.541,532.493
  Bottom Layer w0.15: v1(628.193,527.787) 628.269,527.863 640.207,527.863 648.132,535.788 700.786,535.788 v1(701.142,536.143)
NetC166_1: C166.1 DD16.3 R194.1 | length 96.6
  Top Layer w0.15: v1(701.6,523.088) DD16.3@701.6,524.65 701.6,527.599 706.501,532.5 R194.1@707.5,532.5
  Bottom Layer w0.15: C166.1@625,505.5 629.303,509.803 640.042,509.803 645.676,515.438 655.163,515.438 658.622,518.897 660.425,518.897 663.439,521.91 681.72,521.91 682.015,521.614 683.26,521.614 684.733,523.088 v1(701.6,523.088)
NetC167_1: C167.1 DD16.19 R205.2 VD17.2 | length 85.5
  Top Layer w0.15: VD17.2@644.4,500 644.4,502.437 644.5,502.537 R205.2@644.5,505 644.5,505.968 645.008,506.476 645.871,506.476 650.24,510.845 652.043,510.845 652.348,510.54 652.348,504.652 C167.1@654.5,502.5 ; v1(689.331,513.766) 690.465,514.9 DD16.19@692.5,514.9
  Bottom Layer w0.15: C167.1@654.5,502.5 646.862,510.138 646.862,513.131 647.498,513.767 666.393,513.767 666.852,513.309 688.873,513.309 v1(689.331,513.766)
NetC168_1: C168.1 DD16.2 R193.1 | length 113.2
  Top Layer w0.15: DD16.2@702.25,524.65 702.25,523.579 703.072,522.757 703.453,522.757 ; v1(703.453,520.268) 703.453,522.757 ; R193.1@712.5,532.5 710.413,532.5 703.453,525.54 703.453,522.757
  Bottom Layer w0.15: C168.1@617.5,505.5 618.329,504.671 625.55,504.671 629.539,508.66 639.707,508.66 646.08,515.034 655.445,515.034 656.768,516.357 659.968,516.357 662.863,519.251 678.344,519.251 680.098,521.005 680.999,521.005 681.736,520.268 v1(703.453,520.268)
NetC170_1: C170.1 R208.2 VT1.1 | length 179.7
  Top Layer w0.15: VT1.1@710.75,511.25 v1(710.75,512.47) ; v1(718.185,519.905) 718.185,523.24 718.693,523.748 720.541,523.748 722.5,525.707 R208.2@722.5,527.5
  Bottom Layer w0.15: C170.1@602.5,502.5 611.865,493.135 672.186,493.135 674.042,494.991 683.943,494.991 684.34,495.388 689.331,495.388 689.933,494.786 708.508,494.786 710.641,496.919 710.641,501.447 714.273,505.079 726.948,505.079 727.507,505.638 727.507,506.908 721.944,512.47 v1(710.75,512.47) v1(718.185,519.905)
NetDD1_2: DD1.2 DD1.3 | length 1.3
  Top Layer w0.15: DD1.3@612.54,700 DD1.2@613.81,700
NetDD1_4: DD1.4 R11.1 | length 54.6
  Top Layer w0.15: v1(608.355,692.226) 608.101,692.48 608.101,695.122 611.27,698.29 DD1.4@611.27,700 ; R11.1@635.5,675 635.5,676.038 637.489,678.028 v1(637.489,689.178)
  Bottom Layer w0.15: v1(608.355,692.226) 610.659,689.923 635.329,689.923 636.074,689.178 v1(637.489,689.178)
NetDD1_11: DD1.11 DD1.12 | length 1.3
  Top Layer w0.15: DD1.11@611.27,693.8 DD1.12@612.54,693.8
NetDD4_2: DD4.2 R33.1 | length 23.2
  Top Layer w0.15: R33.1@587,665 587,666.324 v1(587.07,666.394) ; v1(604.475,670.992) DD4.2@604.475,672.278
  Bottom Layer w0.15: v1(587.07,666.394) 587.516,665.949 600.888,665.949 601.181,666.242 601.181,667.698 v1(604.475,670.992)
NetDD4_3: DD4.3 R34.1 | length 34.5
  Top Layer w0.15: R34.1@582.5,660 582.498,660 582.498,668.807 v1(583.311,669.62) ; DD4.3@605.125,672.278 605.125,673.375 v1(605.155,673.405)
  Bottom Layer w0.15: v1(583.311,669.62) 594.896,669.62 598.411,673.135 604.885,673.135 v1(605.155,673.405)
NetDD4_4: DD4.4 R35.1 | length 39
  Top Layer w0.15: v1(586.231,672.744) 586.207,672.72 586.207,660.279 586.486,660 R35.1@587.5,660 ; v1(604.571,674.903) 605.784,673.69 605.784,673.191 605.775,673.182 DD4.4@605.775,672.278
  Bottom Layer w0.15: v1(586.231,672.744) 587.812,674.325 596.9,674.325 598.096,675.521 598.805,675.521 599.021,675.737 599.021,676.981 599.325,677.285 602.189,677.285 v1(604.571,674.903)
NetDD4_5: DD4.5 R36.1 | length 22.6
  Top Layer w0.15: R36.1@592.5,660 594.595,660 599.451,664.856 599.451,669.866 599.948,670.363 605.618,670.363 606.425,671.17 DD4.5@606.425,672.278
NetDD4_6: DD4.6 R37.1 | length 22.2
  Top Layer w0.15: R37.1@597.5,657 599.012,657 599.872,657.86 599.872,667.311 602.52,669.959 606.064,669.959 607.075,670.969 DD4.6@607.075,672.278
NetDD4_7: DD4.7 R38.1 | length 18
  Top Layer w0.15: R38.1@602.5,657 603.377,657 603.58,657.203 603.58,666.72 607.725,670.865 DD4.7@607.725,672.278
NetDD4_8: DD4.8 R39.1 | length 12.7
  Top Layer w0.15: R39.1@607.5,660 607.492,660 607.492,666.09 608.375,666.973 DD4.8@608.375,672.278
NetDD4_9: DD4.9 R40.1 | length 14.8
  Top Layer w0.15: DD4.9@609.025,672.278 609.025,661.616 610.641,660 R40.1@612.5,660
NetDD4_12: DD4.12 R41.1 | length 21.8
  Top Layer w0.15: DD4.12@610.975,672.278 610.975,673.357 v1(612.324,674.706) ; R41.1@617.5,660 617.804,660 v1(617.804,671.271)
  Bottom Layer w0.15: v1(612.324,674.706) 615.004,674.706 617.804,671.906 v1(617.804,671.271)
NetDD4_13: DD4.13 R42.1 | length 18.5
  Top Layer w0.15: DD4.13@611.625,672.278 611.625,671.646 611.511,671.532 611.511,670.56 612.019,670.052 v1(614.553,670.052) ; v1(622.198,662.407) 622.198,660 R42.1@622.5,660
  Bottom Layer w0.15: v1(614.553,670.052) v1(622.198,662.407)
NetDD4_14: DD4.14 R43.1 | length 21.7
  Top Layer w0.15: v1(612.275,671.152) DD4.14@612.275,672.278 ; v1(626.205,660) R43.1@627.5,660
  Bottom Layer w0.15: v1(612.275,671.152) 612.699,671.576 615.251,671.576 626.205,660.622 v1(626.205,660)
NetDD4_15: DD4.15 R44.1 | length 50.5
  Top Layer w0.15: R44.1@582.5,652.5 583.488,652.5 583.641,652.653 v1(583.641,666.039) ; DD4.15@612.925,672.278 612.925,673.504 v1(613.486,674.065)
  Bottom Layer w0.15: v1(583.641,666.039) 585.851,668.249 597.949,668.249 599.994,670.294 599.994,671.521 601.193,672.719 612.14,672.719 v1(613.486,674.065)
NetDD4_16: DD4.16 R45.1 | length 52.9
  Top Layer w0.15: R45.1@587.5,652.5 587.477,652.5 587.477,653.642 588.991,655.157 588.991,662.035 v1(588.823,662.203) ; DD4.16@613.575,672.278 613.575,673.24 614.667,674.332 616.268,674.332 616.712,673.887 v1(616.712,665.963)
  Bottom Layer w0.15: v1(588.823,662.203) 592.492,662.203 592.893,661.803 612.552,661.803 v1(616.712,665.963)
NetDD4_17: DD4.17 R46.1 | length 40
  Top Layer w0.15: R46.1@592.5,652.5 591.789,652.5 591.011,653.278 591.011,658.682 591.4,659.072 591.4,661.211 593.136,662.818 v1(593.522,662.432) ; v1(613.08,670.712) 613.717,670.712 614.225,671.22 DD4.17@614.225,672.278
  Bottom Layer w0.15: v1(593.522,662.432) 600.634,662.432 601.65,663.448 601.65,666.496 602.336,667.182 609.549,667.182 v1(613.08,670.712)
NetDD4_18: DD4.18 R47.1 | length 38.2
  Top Layer w0.15: R47.1@597.5,652.5 599.948,652.5 600.386,652.938 600.386,666.731 v1(600.507,666.852) ; DD4.18@614.875,672.278 614.875,673.397 v1(614.985,673.506)
  Bottom Layer w0.15: v1(600.507,666.852) 600.507,671.398 601.211,672.103 613.581,672.103 v1(614.985,673.506)
NetDD4_19: DD4.19 R48.1 | length 31.2
  Top Layer w0.15: R48.1@602.5,652.5 601.421,652.653 601.421,664.522 v1(602.912,666.013) ; v1(614.876,670.916) 615.525,671.144 DD4.19@615.525,672.278
  Bottom Layer w0.15: v1(602.912,666.013) 609.753,666.013 613.731,669.991 613.731,670.568 614.078,670.916 v1(614.876,670.916)
NetDD4_56: DD4.56 R24.2 | length 16
  Top Layer w0.15: R24.2@597.5,700 597.5,699.008 606.425,690.083 DD4.56@606.425,687.722
NetDD4_57: DD4.57 R23.2 | length 13.9
  Top Layer w0.15: R23.2@597.5,695 597.5,692.464 v1(600.126,689.839) ; v1(605.521,689.839) 605.775,689.585 DD4.57@605.775,687.722
  Bottom Layer w0.15: v1(600.126,689.839) v1(605.521,689.839)
NetDD4_64: DD4.64 L10.1 | length 93.7
  Top Layer w0.15: L10.1@567.5,638.5 571.901,638.5 572.465,639.064 572.465,648.03 574.827,648.03 578.561,651.764 578.561,654.025 577.444,655.142 v1(577.444,662.517) ; v1(595.935,679.704) 595.935,695.223 596.9,696.189 598.373,696.189 601.009,693.553 601.009,687.166 600.618,686.775 600.618,685.028 601.421,684.225 DD4.64@602.278,684.225
  Bottom Layer w0.15: v1(577.444,662.517) 577.444,665.556 592.17,680.282 595.357,680.282 v1(595.935,679.704)
NetDD4_65: DD4.65 L11.1 | length 71.9
  Top Layer w0.15: L11.1@575,638.5 577.826,638.5 578.917,639.591 578.917,641.553 579.755,642.391 v1(579.755,674.141) ; DD4.65@602.278,683.575 603.184,683.575 v1(603.58,683.971)
  Bottom Layer w0.15: v1(579.755,674.141) 586.328,680.715 590.63,680.715 591.006,681.09 604.128,681.09 604.622,681.584 604.622,683.616 604.266,683.971 v1(603.58,683.971)
NetDD4_66: DD4.66 L9.1 | length 92.4
  Top Layer w0.15: L9.1@560,638.5 562.268,638.5 562.268,644.044 562.525,644.301 562.525,654.025 561.699,654.85 561.699,655.555 561.086,656.168 v1(561.086,667.182) ; v1(600.735,683.92) 600.735,683.662 601.472,682.925 DD4.66@602.278,682.925
  Bottom Layer w0.15: v1(561.086,667.182) 560.07,668.198 560.07,672.313 560.324,672.567 561.467,672.567 562.381,673.481 563.372,673.481 564.439,674.548 577.24,674.548 583.811,681.119 590.264,681.119 590.639,681.494 603.491,681.494 604.215,682.219 604.215,683.26 604.14,683.336 601.32,683.336 v1(600.735,683.92)
NetDD4_67: DD4.67 L8.1 | length 39.9
  Top Layer w0.15: L8.1@573.5,700 573.5,697.916 v1(577.545,697.916) ; DD4.67@602.278,682.275 603.306,682.275 v1(603.58,682.549)
  Bottom Layer w0.15: v1(577.545,697.916) 592.664,682.797 595.141,682.797 595.389,682.549 v1(603.58,682.549)
NetDD4_70: DD4.70 R25.1 | length 12.8
  Top Layer w0.15: R25.1@597.5,690 597.5,688.045 599.452,686.092 599.452,681.241 600.368,680.325 DD4.70@602.278,680.325
NetDD4_71: DD4.71 R26.1 | length 8.8
  Top Layer w0.15: R26.1@597.5,685 597.5,681.873 599.698,679.675 DD4.71@602.278,679.675
NetDD4_72: DD4.72 R27.1 | length 5.7
  Top Layer w0.15: R27.1@597.5,680 597.5,679.187 597.662,679.025 DD4.72@602.278,679.025
NetDD4_73: DD4.73 R28.1 | length 10
  Top Layer w0.15: v1(596.392,674.954) 596.9,674.446 597.5,674.446 R28.1@597.5,675 ; v1(599.549,678.375) DD4.73@602.278,678.375
  Bottom Layer w0.15: v1(596.392,674.954) 597.363,675.925 598.424,675.925 598.617,676.118 598.617,677.443 v1(599.549,678.375)
NetDD4_74: DD4.74 R29.1 | length 14.6
  Top Layer w0.15: R29.1@597.5,670 597.5,669.976 596.265,669.976 595.727,670.514 595.727,675.66 597.791,677.725 DD4.74@602.278,677.725
NetDD4_75: DD4.75 R30.1 | length 15.6
  Top Layer w0.15: R30.1@597.5,665 597.5,668.122 598.297,668.919 598.297,672.084 v1(600.171,673.958) ; v1(599.77,676.656) 600.189,677.075 DD4.75@602.278,677.075
  Bottom Layer w0.15: v1(599.77,676.656) 600.171,676.256 v1(600.171,673.958)
NetDD4_76: DD4.76 R31.1 | length 14.1
  Top Layer w0.15: R31.1@590,675 590,676.284 v1(590.296,676.58) ; v1(597.941,676.58) 598.5,676.021 600.608,676.021 601.012,676.425 DD4.76@602.278,676.425
  Bottom Layer w0.15: v1(590.296,676.58) v1(597.941,676.58)
NetDD4_77: DD4.77 R32.1 | length 14.8
  Top Layer w0.15: R32.1@590,670 590,670.306 v1(592.252,670.306) ; v1(599.288,675.109) 599.793,675.614 600.803,675.614 600.964,675.775 DD4.77@602.278,675.775
  Bottom Layer w0.15: v1(592.252,670.306) 593.801,670.306 598.604,675.109 v1(599.288,675.109)